# Altium PCB ECEN5730_BOARD2.PcbDoc
Units mil, origin at the board's own origin, x right, y up, seen from the top; angles counter-clockwise.
Board outline 3500 x 2390 mil, 2 copper layers (Top Layer, Bottom Layer); 45 components, 30 nets, 144 pads, 28 vias.
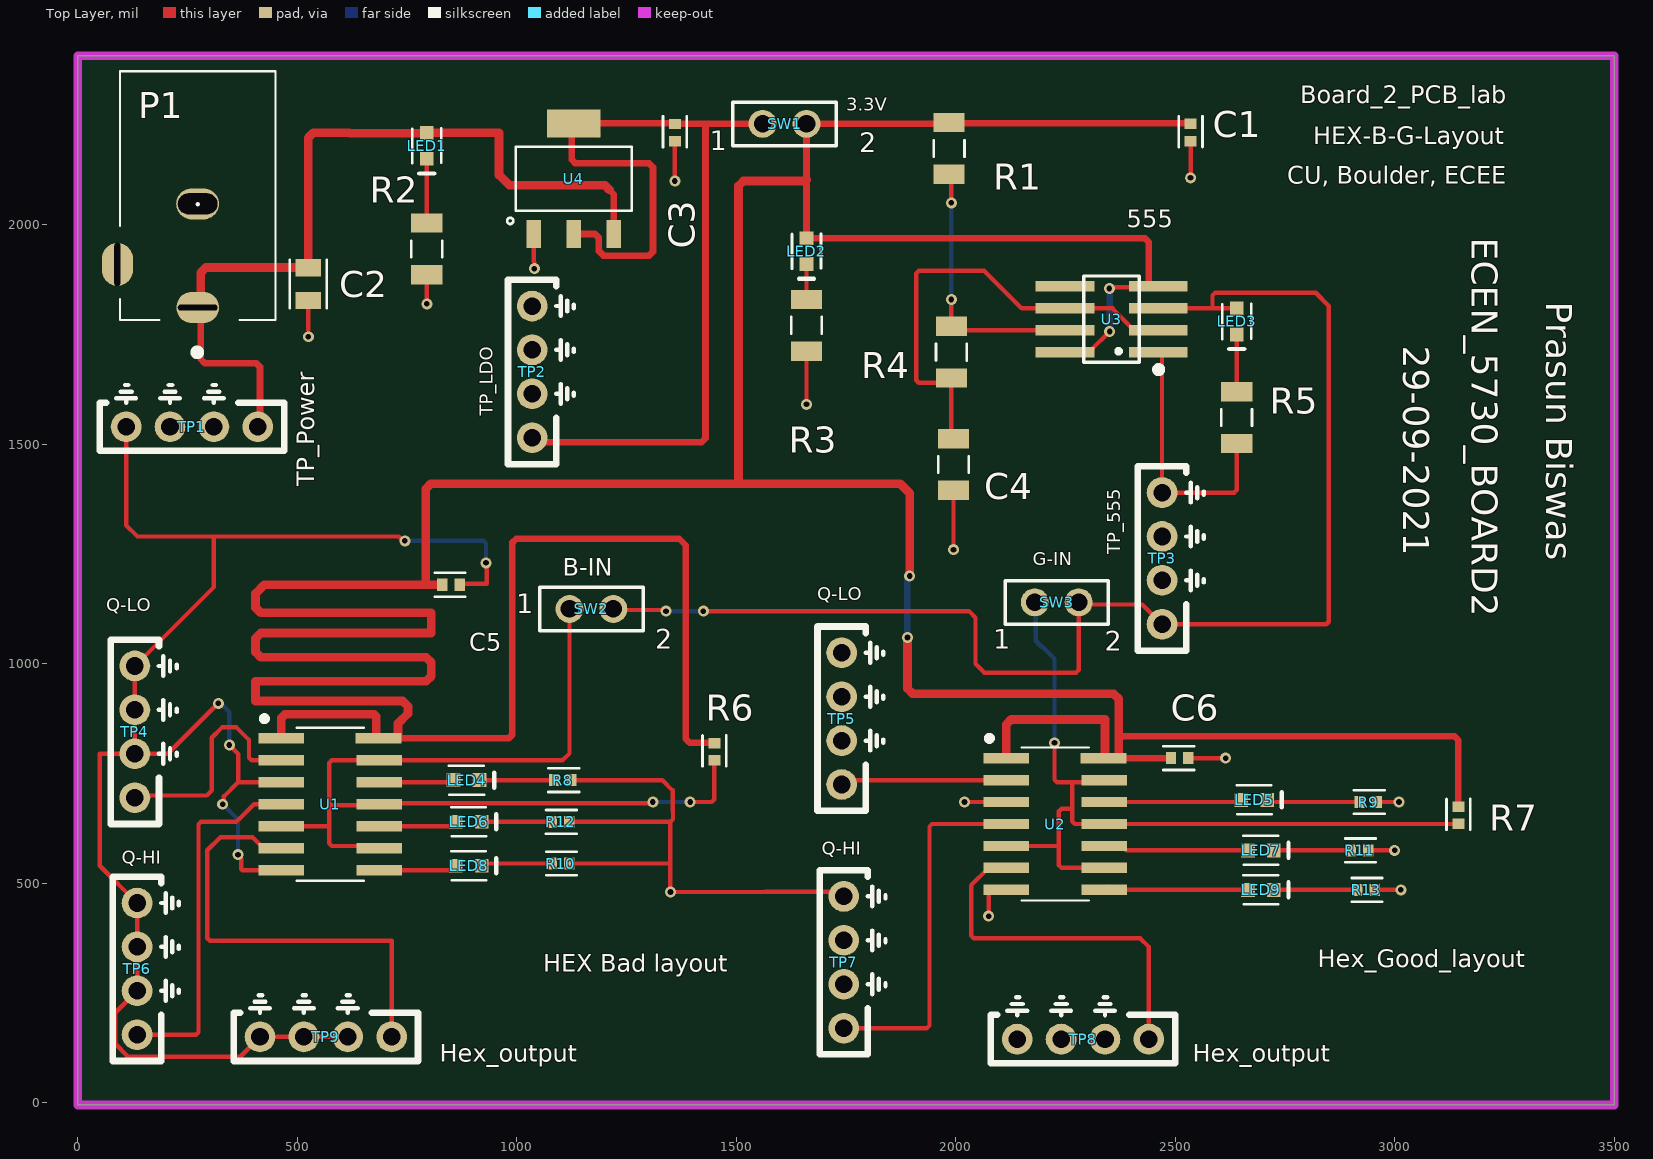
[diagram p0: Top Layer view]
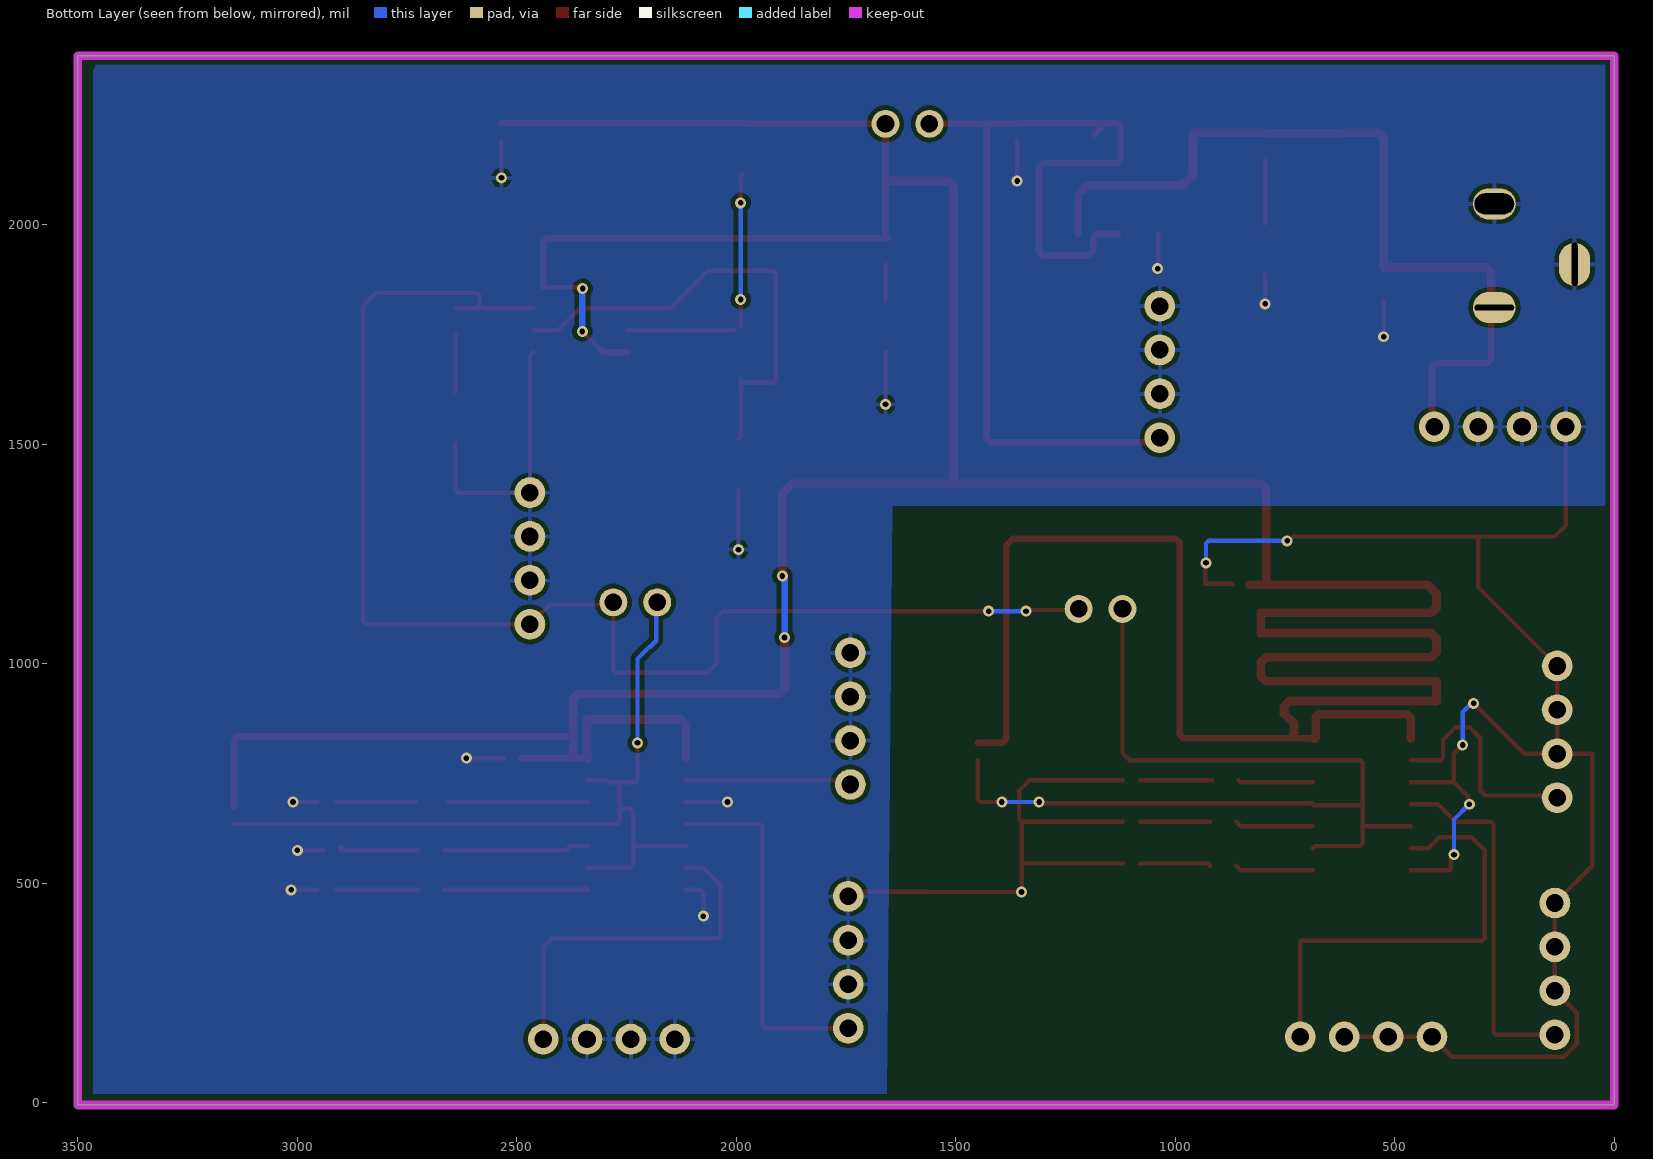
[diagram p1: Bottom Layer view, seen from below]
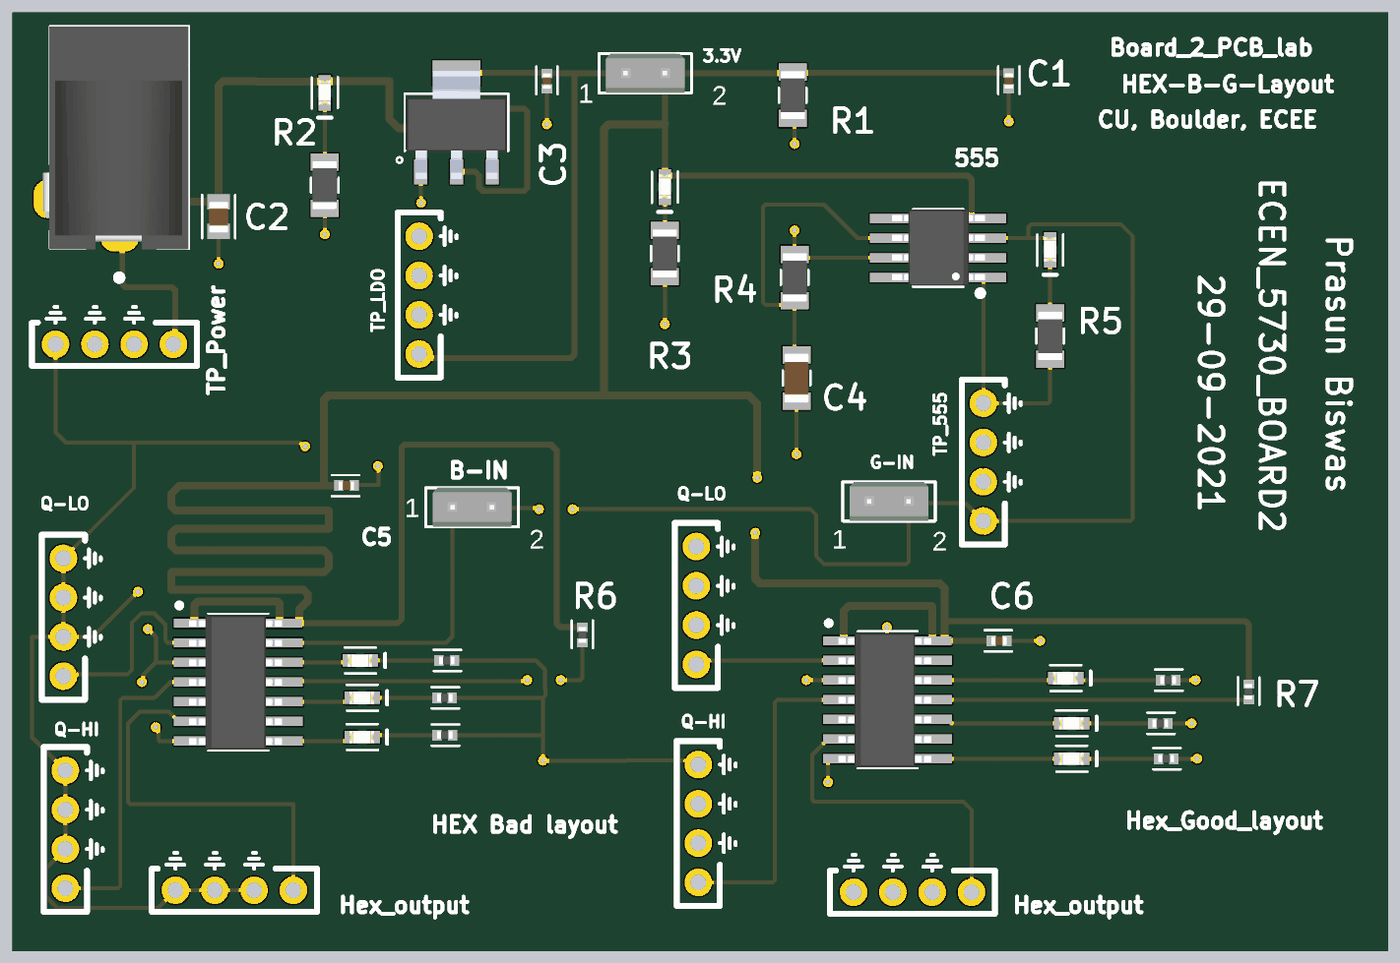
[diagram p2: 3D render of the assembled board from above, using the file's embedded part models]

## Layer stack, top to bottom
Top Solder: solder mask 0.4, Solder Resist, Dk 3.5
Top Layer: signal copper 1.4
Dielectric 1: dielectric 12.6, FR-4, Dk 4.8
Bottom Layer: signal copper 1.4
Bottom Solder: solder mask 0.4, Solder Resist, Dk 3.5

## Board outline
0,-5 3500,-5 3500,2385 0,2385

## Design rules (kind name [scope] priority, off if disabled: settings)
BoardOutlineClearance [All] p1: gap=10 ignorepadtopadclearanceinfootprint=FALSE except(0: Arc-SplitContinuation Track-SplitContinuation SMDPad-SplitContinuation THPad-SplitContinuation Via-SplitContinuation Fill-SplitContinuation Poly-SplitContinuation Region-SplitContinuation Text-SplitContinuation)
Clearance [All] p1: gap=10 ignorepadtopadclearanceinfootprint=FALSE except(0: Arc-Hole Track-Hole SMDPad-Hole THPad-Hole Via-Hole Fill-Hole Poly-Hole Region-Hole Text-Hole)
PlaneClearance [All] p1: clearance=10
PlaneConnect [All] p1: planeconnectstyle=Direct reliefexpansion=20 reliefentries=4 reliefconductorwidth=10 reliefairgap=10
PolygonConnect [All] p1: thpad.connectstyle=Relief thpad.reliefconductorwidth=10 thpad.reliefentries=4 thpad.polygonreliefangle="90 Angle" thpad.airgapwidth=10 smdpad.connectstyle=Direct smdpad.reliefconductorwidth=10 smdpad.reliefentries=4 smdpad.polygonreliefangle="90 Angle" smdpad.airgapwidth=10 via.connectstyle=Direct via.reliefconductorwidth=10 via.reliefentries=4 via.polygonreliefangle="90 Angle" via.airgapwidth=10
RoutingVias [All] p1: holewidth=13 width=25 viastyle="Through Hole" minholewidth=13 minwidth=25 maxholewidth=60 maxwidth=80
SolderMaskExpansion [All] p1: expansion=4 istentingtop=FALSE
Width "Schematic Width Constraint_3" [InNet('3.3V')] p1: maxlimit=100 minlimit=10 preferedwidth=20 minimp=50.000000 maximp=50.000000 favimp=50.000000
Width "Schematic Width Constraint_1" [InNet('LDO_OUT')] p2: maxlimit=100 minlimit=10 preferedwidth=20 minimp=50.000000 maximp=50.000000 favimp=50.000000
Width "Schematic Width Constraint" [InNet('+5')] p3: maxlimit=100 minlimit=10 preferedwidth=20 minimp=50.000000 maximp=50.000000 favimp=50.000000
Width [All] p4: maxlimit=10 minlimit=10 preferedwidth=10
28 further rules are at their usual default settings.

## Components (designator, comment, footprint, x,y, rotation, side; value= is the part's Value field where it differs from the comment)
C1 "10uF" 0402_Passive_Capacitor 2535,2210.31 r90 top
C2 "22uF" 0805_Passive_Capaciitor 525,1865 r90 top
C3 "10uF" 0402_Passive_Capacitor 1360,2210 r90 top
C4 "1uF" 1206_Passive_Capacitor 1995,1454 r90 top
C5 "10uF" 0402_Passive_Capacitor 850,1180 r180 top
C6 "10uF" 0402_Passive_Capacitor 2510,785 r180 top
LED1 "KT-0603R" LED_0603 795,2180 r270 top value=Red
LED2 "KT-0603R" LED_0603 1660,1940 r270 top value=Red
LED3 "KT-0603R" LED_0603 2640,1780 r270 top value=Red
LED4 "KT-0603R" LED_0603 885.47,735 r0 top value=Red
LED5 "KT-0603R" LED_0603 2680,690 r0 top value=Red
LED6 "KT-0603R" LED_0603 890.47,640 r0 top value=Red
LED7 "KT-0603R" LED_0603 2695,575 r0 top value=Red
LED8 "KT-0603R" LED_0603 890.47,540 r0 top value=Red
LED9 "KT-0603R" LED_0603 2695,485 r0 top value=Red
P1 "Power Jack" Power_Jack 273.07,1811.57 r90 top value="CONN PWR JACK 2X5.5MM SOLDER"
R1 "1k" 1206_Passive_Resitor 1985,2174 r90 top value="1K Ohm"
R2 "1k" 1206_Passive_Resitor 795,1945 r90 top value="1K Ohm"
R3 "1k" 1206_Passive_Resitor 1660,1771 r90 top value="1K Ohm"
R4 "1k" 1206_Passive_Resitor 1990,1710 r90 top value="1K Ohm"
R5 "1k" 1206_Passive_Resitor 2640,1561 r90 top value="1K Ohm"
R6 "10k" 0402_Passive_Resistor 1450,799.68 r90 top value=10KOhm
R7 "10k" 0402_Passive_Resistor 3145,655 r90 top value=10KOhm
R8 "50 Ohms" 0402_Passive_Resistor 1105,735 r0 top value=49.9Ohm
R9 "50 Ohms" 0402_Passive_Resistor 2940,685 r0 top value=49.9Ohm
R10 "50 Ohms" 0402_Passive_Resistor 1100,545 r0 top value=49.9Ohm
R11 "50 Ohms" 0402_Passive_Resistor 2920,575 r0 top value=49.9Ohm
R12 "50 Ohms" 0402_Passive_Resistor 1099.69,640 r0 top value=49.9Ohm
R13 "50 Ohms" 0402_Passive_Resistor 2935,485 r0 top value=49.9Ohm
SW1 "on_off_switch" 2Pin-Header-Conn 1560,2230 r0 top
SW2 "on_off_switch" 2Pin-Header-Conn 1120,1125 r0 top
SW3 "on_off_switch" 2Pin-Header-Conn 2180,1140 r0 top
TP1 "TP_5V" TP10x_Probe 260,1540 r180 top
TP2 "TP_5V" TP10x_Probe 1035,1665 r90 top
TP3 "TP_555_OUTPUT" TP10x_Probe 2470,1240 r90 top
TP4 "TP_555_OUTPUT" TP10x_Probe 130,845 r90 top
TP5 "TP_555_OUTPUT" TP10x_Probe 1740,875 r90 top
TP6 "TP_555_OUTPUT" TP10x_Probe 135,305 r90 top
TP7 "TP_555_OUTPUT" TP10x_Probe 1745,320 r90 top
TP8 "TP_555_OUTPUT" TP10x_Probe 2290,145 r180 top
TP9 "TP_555_OUTPUT" TP10x_Probe 565,150 r180 top
U1 "74HC14D,653" HEX_74AC14 575,680 r0 top (schematic designator p2)
U2 "74HC14D,653" HEX_74AC14 2226.65,635 r0 top
U3 "NE555DR" TS555IDTTR 2355,1785 r180 top
U4 "AMS1117-3.3" LDO 1130,2105 r0 top value="IC REG LINEAR 3.3V 800MA SOT223"

## Footprints (in the part's own frame and the unit in brackets; to place one, negate y for a bottom-side part, rotate by r counter-clockwise, add the part's x,y. Pads: shape width x height; smd on the part's side, far side on the other; paste and mask are expansions set on the pad)
2Pin-Header-Conn [mm]
  round 1.62 hole 1.02: 1(0,0) 2(2.54,0)
  silkscreen extent -1.72,-1.27 4.26,1.26, body extent -1.27,-1.27 3.81,1.27, height 8.13
0402_Passive_Capacitor [mm] "Reference: https://www.worthingtonassembly.com/perfect-0402-footprint"
  rect 0.6x0.7 smd mask+0: 1(-0.5,0) 2(0.5,0)
  silkscreen extent -0.84,-0.69 0.94,0.69, body extent -0.5,-0.27 0.5,0.28, height 0.5
0402_Passive_Resistor [mm] "Reference: https://www.worthingtonassembly.com/perfect-0402-footprint"
  rect 0.6x0.7 smd mask+0: 1(-0.5,0) 2(0.5,0)
  silkscreen extent -0.84,-0.69 0.94,0.69, body extent -0.49,-0.25 0.51,0.25, height 0.4
0805_Passive_Capaciitor [mm] "Reference: http://livepartlibrary.com/fpdimensions.html"
  rect 1x1.45 smd mask+0: 1(-0.95,0) 2(0.95,0)
  silkscreen extent -1.4,-1.07 1.4,1.07, body extent -1.04,-0.62 0.96,0.63, height 1.4
1206_Passive_Capacitor [mil]
  rect 44x71 smd: 1(-59,0) 2(59,0)
  silkscreen extent -19,-35 19,35, body extent -63,-31 63,32, height 50
1206_Passive_Resitor [mil]
  rect 44x71 smd: 1(-59,0) 2(59,0)
  silkscreen extent -19,-35 19,35, body extent -61,-31 61,31, height 26
HEX_74AC14 [mm]
  rect 2.65x0.6 smd: 1(-2.836,3.81) 2(-2.836,2.54) 3(-2.836,1.27) 4(-2.836,0) 5(-2.836,-1.27) 6(-2.836,-2.54) 7(-2.836,-3.81) 8(2.836,-3.81) 9(2.836,-2.54) 10(2.836,-1.27) 11(2.836,0) 12(2.836,1.27) 13(2.836,2.54) 14(2.794,3.81)
  silkscreen extent -3.94,-4.43 1.95,5.08, body extent -3.18,-4.35 2.82,4.3, height 1.75
LDO [mil]
  rect 33x63 smd: 1(-91,-126) 2(0,-126) 3(91,-126)
  rect 122x63 smd: 4(0,126)
  silkscreen extent -152,-103 132,73, body extent -128,-144 128,132, height 73
LED_0603 [mm]
  rect 0.8x0.8 smd: 1(-0.75,0) 2(0.75,0)
  silkscreen extent -1.02,-0.84 1.6,0.84, body extent -0.84,-0.41 0.76,0.39, height 0.55
Power_Jack [mm]
  oval 1.797x2.479 hole 0.33 slot 2.289 at 90 deg: 1(0,0)
  oval 1.8x2.487 hole 1.2 slot 2.286 at 90 deg: 2(6,0)
  oval 2.487x1.8 hole 0.33 slot 2.5 at 0 deg: 3(2.5,4.65)
  silkscreen extent -2.79,-4.5 13.68,4.5, body extent -0.76,-4.45 13.64,4.95, height 11.49
TP10x_Probe [mil] "Small Probs footprint"
  round 70 hole 40: 1(-150,0) 2(-50,0) 2(50,0) 2(150,0)
  silkscreen extent -210,-95 210,55
TS555IDTTR [mm] "IC OSC Single Timer 2.7MHz 8SOIC"
  rect 3.4x0.6 smd: 1(-2.7,1.905) 2(-2.7,0.635) 3(-2.7,-0.635) 4(-2.7,-1.905) 5(2.7,-1.905) 6(2.7,-0.635) 7(2.7,0.635) 8(2.7,1.905)
  silkscreen extent -2.85,-2.5 1.6,3.05, body extent -3.03,-2.48 2.96,2.43, height 1.75

## Part data
C1 C3 C5 C6: library part C_10uF_0402, "10uF ±20% 6.3V X5R 0402 Multilayer Ceramic Capacitors MLCC - SMD/SMT RoHS", LCSC Part#=C15525, MFR Part #=CL05A106MQ5NUNC, Datasheet=https://datasheet.lcsc.com/lcsc/1810191215_Samsung-Electro-Mechanics-CL05A106MQ5NUNC_C15525.pdf, Type=Basic
C2: library part C_22uF_0805, "MULTILAYER CERAMIC CAPACITORS MLCC - SMD/SMT 22UF 25V 0805 ROHS", LCSC Part#=C45783, MFR Part #=CL21A226MAQNNNE, Datasheet=https://datasheet.lcsc.com/szlcsc/Samsung-Electro-Mechanics-CL21A226MAQNNNE_C45783.pdf, Type=Basic
C4: library part C_1uF_1206, "MULTILAYER CERAMIC CAPACITORS MLCC - SMD/SMT 1UF 50V 1206 ROHS", LCSC Part#=C1848, MFR Part #=CL31B105KBHNNNE, Digikey Link=https://www.digikey.com/product-detail/en/C1206C105M4RACTU/399-8150-1-ND/3471873/?itemSeq=304982366, Digikey Part=399-8150-1-ND, Type=Basic
LED1 LED2 LED3 LED4 LED5 LED6 LED7 LED8 LED9: library part LED_RED_0603, "LIGHT EMITTING DIODES (LED) RED 520~625NM 90~100MCD@20MA TOP VIEW 0603 ROHS", LCSC Part#=C2286, Datasheet=https://datasheet.lcsc.com/szlcsc/Everlight-Elec-19-217-BHC-ZL1M2RY-3T_C72041.pdf, MFR Part #=KT-0603R, Type=Basic
P1: library part "P_Power Jack", "Power Barrel Connector Jack 2.10mm ID (0.083\"), 5.50mm OD (0.217\") Through Hole, Right Angle", LCSC Part#=C136744, Digikey Link=https://www.digikey.com/product-detail/en/PJ-102A/CP-102A-ND/275425/?itemSeq=304982367, Digikey Part=CP-102A-ND, Type=Extended
R1 R2 R3 R4 R5: library part R_1K_1206, "CHIP RESISTOR - SURFACE MOUNT 1KOHMS ±1% 1/4W 1206 ROHS", LCSC Part#=C4410, MFR Part #=1206W4F1001T5, Digikey Link=https://www.digikey.com/product-detail/en/RNCP1206FTD1K00/RNCP1206FTD1K00CT-ND/2240675/?itemSeq=304982373, Digikey Part=RNCP1206FTD1K00CT-ND, Type=Basic
R6 R7: library part R_10KOhm_0402, "CHIP RESISTOR - SURFACE MOUNT 10KOHMS ±1% 1/16W 0402 ROHS", LCSC Part#=C25744, MFR Part #=0402WGF1002TCE, Datasheet=https://datasheet.lcsc.com/szlcsc/Uniroyal-Elec-0402WGF1002TCE_C25744.pdf, Type=Basic
R8 R9 R10 R11 R12 R13: library part R_50Ohm_0402, "CHIP RESISTOR - SURFACE MOUNT 49.9OHMS ±1% 1/16W 0402 ROHS", LCSC Part#=C25120, MFR Part #=0402WGF499JTCE, Datasheet=https://datasheet.lcsc.com/szlcsc/Uniroyal-Elec-0402WGF499JTCE_C25120.pdf, Type=Basic
SW1 SW2 SW3: library part SW_2Pin_100mil_Switch, "2Pin Header", LCSC Part#=C124375, Type=Extended
TP1 TP2 TP3 TP4 TP5 TP6 TP7 TP8 TP9: library part TP_10x_Probe, "Test Point 300 mil centers"
U1 U2: library part U_7414_HC_Hex, "Inverter IC 6 Channel Schmitt Trigger 14-SOIC", LCSC Part#=C5605, Datasheet=https://datasheet.lcsc.com/szlcsc/ON-Semicon-ON-74AC14SCX_C5482.pdf, MFR Part #=74HC14D,653, Type=Basic
U3: library part U_555_Slow, "555 Timer SOIC-8_150MIL ROHS 150ns Rise Time", LCSC Part#=C7593, Digikey Link=https://www.digikey.com/product-detail/en/texas-instruments/NE555DR/296-6501-1-ND/372490, MFR Part #=NE555DR, Type=Basic
U4: library part PS_AMS_LDO_3v3, "LOW DROPOUT REGULATORS(LDO) POSITIVE FIXED 1.3V @ 800MA 15V 3.3V 1A SOT-223 ROHS", LCSC Part#=C6186, MFR Part #=AMS1117-3.3, Type=Basic

## Free pads (board coordinates)
  round 25 hole 13: 2(2535,2107.03) 5(1660,1591) 7(1995,1260)

## Via types
v1: diameter 25, hole 13, Top Layer to Bottom Layer, 28 vias

## Nets (pads, with @x,y where several pads share a name; then routed paths per layer and width w, separated by ;. In a path a pad name is that pad's centre, name@x,y a point inside that pad or via, vN(x,y) a via of type N, cw(c..) or ccw(c..) an arc to the next point about the centre after c; other vN are vias at no path point)
3.3V: C3.2 SW1.1 TP2.1 U4.2 U4.4 | length 2268
  Top Layer w15: TP2.1 1045,1505 1421.21,1505 1430,1513.79 1430,2225 ; U4.2@1130.57,1979 1178.21,1979 1187,1970.21 1187,1940.25 1197.25,1930 1301.46,1930 1310.24,1938.79 1310.24,2131.21 1301.46,2140 1133.79,2140 1125,2148.79 1125,2226 U4.4 U4.4@1159.5,2231 ; U4.4@1183.5,2207 U4.4@1159.5,2231 ; C3.2@1360,2231 U4.4@1159.5,2231 ; C3.2@1360.31,2230 1430,2230 SW1.1
555_OUTPUT: LED3.1 SW2.2 SW3.2 TP3.1 U3.3 | length 3131.2
  Top Layer w10: SW2.2 1222.5,1122.5 1337.5,1122.5 v1(1340,1120) ; v1(1425,1120) 2030,1120 2045,1105 2045,1000 2065,980 2274.14,980 2280,985.86 2280,1135 2425,1135 TP3.1 2844.14,1090 2850,1095.86 2850,1815 2820,1845 2590.86,1845 2585,1839.14 2585,1810 ; U3.3 2585,1810 ; LED3.1 2639.53,1810 2585,1810
  Bottom Layer w10: v1(1340,1120) v1(1425,1120)
+5: C2.2 LED1.1 P1.1 TP1.1 U4.3 | length 1948
  Top Layer w15: P1.1 280,1804.65 280,1693.82 288.79,1685.03 406.21,1685.03 415,1676.24 TP1.1@415,1540.45 ; 1210.92,2079.92 1221,2069.85 U4.3
  Top Layer w20: P1.1@250,1808.78 251.43,1810.21 255.2,1810.21 280,1835.01 280,1891 291.72,1902.72 C2.2@525,1902.72 ; C2.2 C2.2@525,1902.72 ; 1210.92,2079.92 1200.85,2090 983.31,2090 959.53,2113.79 959.53,2209.53 LED1.1 793.94,2208.46 620,2208.46 618.46,2210 536.72,2210 525,2198.28 C2.2@525,1902.72
GND: C1.1 C2.1 C3.1 C4.1 C5.1 C6.1 P1.2 P1.3 pad.2 pad.5 pad.7 R2.1 R3.1 R5.1 R8.2 R9.2 R10.2 R11.2 R12.2 R13.2 TP1.2 TP2.2 TP3.2 TP4.2 TP5.2 TP6.2 TP7.2 TP8.2 TP9.2 U1.3 U1.7 U2.3 U2.7 U3.1 U4.1 | length 7006.1
  Top Layer w10: TP1.2@110,1540 110,1315.86 135.86,1290 310,1290 ; v1(320,910) 205,795 TP4.2@130,795 ; v1(330,680) 332.87,682.87 332.87,697.87 365,730 365.82,730 ; v1(345,815) 365.82,794.18 365.82,730 ; v1(365,565) 372.65,557.35 372.65,532.35 375,530 U1.7 ; U1.3 365.82,730 ; 525,1760 C2.1 ; TP9.2@615,150 515,150 415,150 370,105 114.29,105 85,134.29 85,205 135,255 135,355 135,455 50,540 50,795 TP4.2@130,795 ; v1(745,1280) 740.94,1280 730.94,1290 310,1290 ; v1(795,1820) R2.1 ; C5.1 871.71,1182.02 931.71,1182.02 ; v1(930,1230) 931.87,1228.13 931.87,1183.89 ; U4.1 1039,1916 1040,1915 ; R12.2 1350,640 ; R8.2@1119.37,735 R8.2 1331.57,735 1355,711.57 1355,663.43 1355.86,662.57 1355.86,645.86 1350,640 ; R10.2 1350,545 ; v1@1360,2110 C3.1 ; R3.1@1658.14,1710.14 R3.1 pad.5 ; TP7.2@1720,475 TP7.2@1725,470 ; TP7.2@1745,470 1734.14,480.86 1565.86,480.86 1565,480 v1(1350,480) 1350,545 ; pad.7 C4.1 ; v1@2030,685 U2.3 ; 2075,440 2075,478.19 2081.81,485 U2.7 ; U3.1 2463.19,1710 2470,1703.19 2470,1390 2634.14,1390 2640,1395.86 R5.1 ; TP3.2@2469,1191 TP3.2@2470,1190 ; C6.1 v1(2615,785) ; pad.2 2540,2109.06 2538.51,2110.54 2535,2114.06 C1.1 ; R11.2 v1(3000,575) ; R13.2 v1(3013.99,485) ; R9.2@2954.69,685 R9.2 v1(3010,685) ; TP4.2@130,795 130,895 130,995 310,1175 310,1290 ; 1350,545 1350,640
  Bottom Layer w10: v1(320,910) 325,910 345,890 v1(345,815) ; v1(330,680) 365,645 v1(365,565) ; v1(745,1280) 924.14,1280 930,1274.14 v1(930,1230)
  other v1: 2075,425 2020,685 525,1745 1040,1900 1360,2100
LDO_OUT: C1.2 C5.2 C6.2 LED2.1 R1.2 R6.2 R7.2 SW1.2 U1.1 U1.14 U2.1 U2.14 U3.4 U3.8 | length 11721.9
  Top Layer w10: U3.8@2308.13,1714.58 v1(2350.63,1757.08) ; v1(2350,1855) 2352.5,1857.5 2438.27,1857.5 U3.4@2440.09,1855.69
  Top Layer w15: 675,885 680,880 ; U1.14 U1.14@725.35,830 ; U1.14@729.67,834.31 U1.14@725.35,830 ; R6.2 1449.37,820 1393.79,820 1385,828.79 1385,1270 1370,1285 998.79,1285 990,1276.21 990,838.79 981.21,830 U1.14@725.35,830 ; LED2.1@1654.89,1970 1660,1975.11 1660,2095 ; LED2.1@1660,1969.09 1700,1969.09 2431.3,1969.09 2440.09,1960.3 U3.4@2440.09,1860 ; 1660,2102.56 SW1.2 1982,2230 R1.2 1986.5,2231.5 2533.5,2231.5 C1.2 ; U3.8 2303.82,1710 2308.13,1714.31 U3.8@2308.13,1714.58 ; U2.14 2338.19,785 U2.14@2366.9,785 ; U2.14@2371.21,789.31 U2.14@2366.9,785 ; 2371.21,826.21 2380,835 3136.21,835 3145,826.21 R7.2 ; C6.2 U2.14@2366.9,785
  Top Layer w20: U1.1 463.35,876.21 472.13,885 675,885 ; 680,880 680,831.81 681.81,830 U1.14 ; U1.14@729.67,834.31 729.67,864.31 752.07,886.72 752.07,903.28 740.35,915 405,915 405,960 793.28,960 805,971.72 805,1003.28 793.28,1015 416.72,1015 405,1026.72 405,1058.28 416.72,1070 805,1070 805,1116.21 416.72,1116.21 405,1127.93 405,1160 425,1180 792.66,1180 ; C5.2 792.66,1180 ; 1660,2102.56 1657.44,2100 1516.72,2100 1505,2088.28 1505,1410 ; v1(1890,1060) 1890,943.53 1901.72,931.81 2359.5,931.81 2371.21,920.1 2371.21,826.21 U2.14@2371.21,789.31 ; v1(1895,1200) 1895,1388.28 1873.28,1410 1505,1410 ; U2.1 2115,861.62 2126.72,873.33 2340,873.33 2340,786.81 U2.14@2338.19,785 ; 792.66,1180 792.66,1398.28 804.37,1410 1505,1410
  Bottom Layer w15: v1(1890,1060) 1890,1195 v1(1895,1200) ; v1(2350,1855) 2350.63,1854.37 v1(2350.63,1757.08)
NetC4_2: C4.2 R4.1 U3.2 U3.6 | length 1076.4
  Top Layer w10: R4.1 R4.1@1990,1640 ; C4.2 1990,1518 R4.1@1990,1640 ; U3.2 2406.18,1760 2357.81,1808.37 2357.81,1810 U3.6 2150,1810 2065,1895 1915.86,1895 1910,1889.14 1910,1645.86 1915.86,1640 R4.1@1990,1640
NetLED1_2: LED1.2 R2.2 | length 146.5
  Top Layer w10: R2.2 LED1.2
NetLED2_2: LED2.2 R3.2 | length 80.5
  Top Layer w10: R3.2 LED2.2
NetLED3_2: LED3.2 R5.2 | length 130.5
  Top Layer w10: R5.2 LED3.2
NetLED4_1: LED4.1 U1.12 | length 171.4
  Top Layer w10: U1.12 850.94,730 LED4.1
NetLED4_2: LED4.2 R8.1 | length 165
  Top Layer w10: LED4.2 R8.1@1080,735
NetLED5_1: LED5.1 U2.12 | length 321.7
  Top Layer w10: U2.12 LED5.1@2660,685
NetLED5_2: LED5.2 R9.1 | length 186.3
  Top Layer w10: 2729.06,685 R9.1@2915.32,685
NetLED6_1: LED6.1 U1.10 | length 178.4
  Top Layer w10: U1.10 850.94,630 LED6.1
NetLED6_2: LED6.2 R12.1 | length 160
  Top Layer w10: LED6.2 R12.1
NetLED7_1: LED7.1 U2.10 | length 331.3
  Top Layer w10: U2.10 2378.66,585 2388.66,575 LED7.1
NetLED7_2: LED7.2 R11.1 | length 184.3
  Top Layer w10: LED7.2@2725.75,575 2901.32,575 R11.1@2901.32,583.68
NetLED8_1: LED8.1 U1.8 | length 178.4
  Top Layer w10: U1.8 850.94,530 LED8.1
NetLED8_2: LED8.2 R10.1 | length 162.4
  Top Layer w10: LED8.2 925,545 R10.1
NetLED9_1: LED9.1 U2.8 | length 336.8
  Top Layer w10: U2.8@2345.12,491.81 U2.8 LED9.1
NetLED9_2: LED9.2 R13.1 | length 190.5
  Top Layer w10: LED9.2 R13.1@2915,485
NetR1_1: R1.1 R4.2 U3.7 | length 591.8
  Top Layer w10: R1.1 1990,2110 v1(1990,2050) ; R4.2 v1(1990,1830) ; R4.2@2005,1760 U3.7
  Bottom Layer w10: v1(1990,1830) v1(1990,2050)
NetR6_1: R6.1 SW2.1 U1.5 U1.9 U1.11 U1.13 | length 2268.9
  Top Layer w10: U1.5 572.5,630 ; U1.9 681.65,585 578.36,585 572.5,590.86 572.5,630 ; SW2.1 1120,795.86 1104.14,780 U1.13 578.36,780 572.5,774.14 572.5,677.5 ; v1(1310,685) 1307.5,682.5 689.15,682.5 684.15,677.5 572.5,677.5 ; v1(1395,685) 1444.14,685 1450,690.86 R6.1 ; 572.5,630 572.5,677.5
  Bottom Layer w10: v1(1310,685) v1(1395,685)
NetR7_1: R7.1 SW3.1 U2.5 U2.9 U2.11 U2.13 | length 1895.2
  Top Layer w10: U2.5 2235,585 ; v1(2225,820) 2225,735.86 2230.86,730 2266.14,730 ; U2.9 2240.86,535 2235,540.86 2235,585 ; U2.13 2295,735 2295,733.86 2291.14,730 2266.14,730 ; R7.1@3144.69,635 2271.14,635 2265.28,640.86 2265.28,670 ; 2235,585 2235,664.14 2240.86,670 2265.28,670 ; 2265.28,670 2265.28,729.14 2266.14,730
  Bottom Layer w10: SW3.1 2182.5,1137.5 2182.5,1052.5 2197.31,1037.69 2198.79,1037.69 2225,1011.48 v1(2225,820)
NetTP4_1: TP4.1 U1.2 | length 524.6
  Top Layer w10: TP4.1 135,700 293.43,700 305,711.57 305,831.57 328.43,855 361.57,855 390,826.57 390,786.18 396.18,780 U1.2
NetTP5_1: TP5.1 U2.2 | length 379.1
  Top Layer w10: TP5.1 1750,735 U2.2
NetTP6_1: TP6.1 U1.4 | length 823.1
  Top Layer w10: TP6.1 269.14,155 275,160.86 275,634.14 280.86,640 361.57,640 401.57,680 U1.4
NetTP7_1: TP7.1 U2.4 | length 828.1
  Top Layer w10: TP7.1 1934.25,170 1940.11,175.86 1940.11,629.14 1945.97,635 U2.4
NetTP8_1: TP8.1 U2.6 | length 836.6
  Top Layer w10: U2.6 2074.65,535 2035,495.35 2035,380.86 2040.86,375 2420,375 2440,355 TP8.1
NetTP9_1: TP9.1 U1.6 | length 1032.7
  Top Layer w10: U1.6 422.99,580 397.99,605 325,605 295,575 295,375 300.86,369.14 715,369.14 TP9.1
pads on no net: U3.5

## Polygon pours and split planes (outlines as drawn)
GND on Bottom Layer "GND_L02_P008" (solid, pour order 8): 3465,2350 3465,20 40,20 35,15 20,30 20,2365 3460,2365 3460,2360

## Keep-outs
Keep-Out Layer:
  lines w20: 0,385 0,2385 3500,2385 3500,385 ; 0,-5 0,2380 5,2385 3495,2385 3500,2380 3500,-5 0,-5

## Other copper
Bottom Layer:
  pour cut-out: 22.5,20.37 1657.5,20.37 1645,1360 1600,1360 22.5,1360

## Silkscreen, mask and mechanical layers (free items; w line width, h text height)
Top Overlay:
  text "Board_2_PCB_lab" at 2785,2276.66 h40
  text "3.3V" at 1750,2260 h30
  text "HEX-B-G-Layout" at 2815,2183.33 h40
  text "CU, Boulder, ECEE" at 2755,2093.33 h40
  text "555" at 2390,1995 h40
  text "ECEN_5730_BOARD2" at 3175,1970 h60 r270
  text "Prasun Biswas" at 3345,1825 h60 r270
  text "29-09-2021" at 3020,1725 h60 r270
  text "TP_LDO" at 945,1565 h30 r90
  text "TP_Power" at 538.34,1405 h40 r90
  text "TP_555" at 2375,1250 h30 r90
  text "G-IN" at 2175,1225 h30
  text "B-IN" at 1105,1200 h40
  text "Q-LO" at 1685,1145 h30
  text "Q-LO" at 65,1120 h30
  text "Q-HI" at 1695,565 h30
  text "Q-HI" at 100,545 h30
  text "Hex_Good_layout" at 2825,308.33 h40
  text "HEX Bad layout" at 1060,298.33 h40
  text "Hex_output" at 825,93.33 h40
  text "Hex_output" at 2540,93.33 h40

## Text inside footprints (layer, text, board x,y; h text height)
SW1: Top Overlay "1" at 1440,2155 h77.5; Top Overlay "2" at 1780,2150 h77.5; Mechanical 16 "1" at 1465,2115 h77.5; Mechanical 16 "2" at 1770,2150 h77.5
SW2: Top Overlay "2" at 1315,1020 h77.5; Top Overlay "1" at 998.35,1100 h77.5; Mechanical 16 "1" at 998.35,1100 h77.5; Mechanical 16 "2" at 1310,1040 h77.5
SW3: Top Overlay "1" at 2085,1020 h77.5; Top Overlay "2" at 2340,1015 h77.5; Mechanical 16 "1" at 2055,1165 h77.5; Mechanical 16 "2" at 2370,1075 h77.5